# Altium PCB main_pcb.PcbDoc
Units mm, origin at the board's own origin, x right, y up, seen from the top; angles counter-clockwise.
Board outline 20 x 50 mm, 2 copper layers (Top Layer, Bottom Layer); 27 components, 16 nets, 108 pads, 18 vias.
Unrouted connection lines stored in the file: 1.
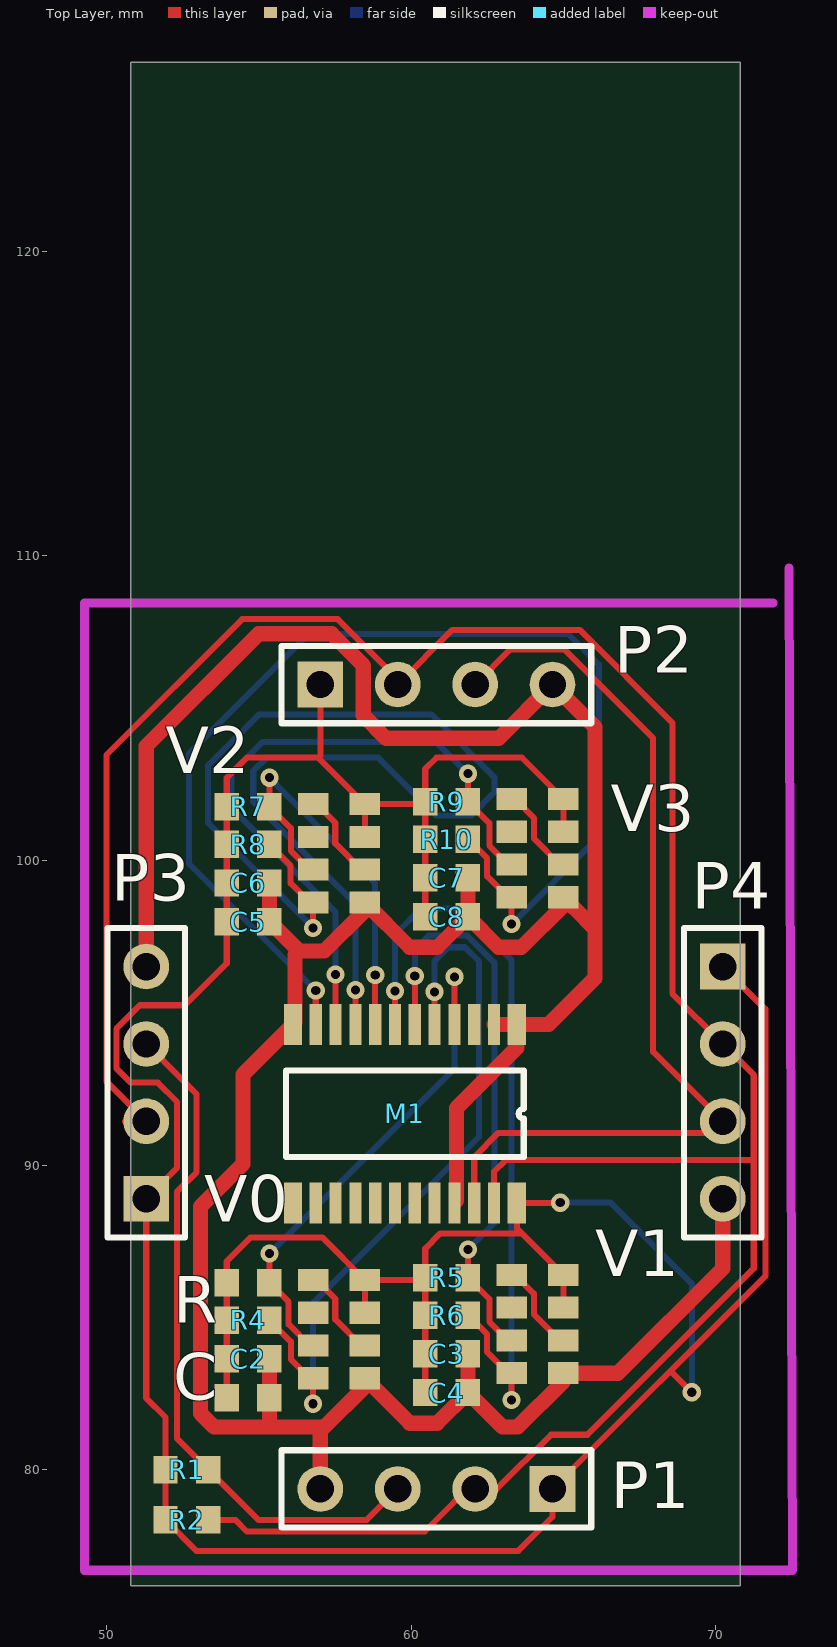
[diagram p0: Top Layer view]
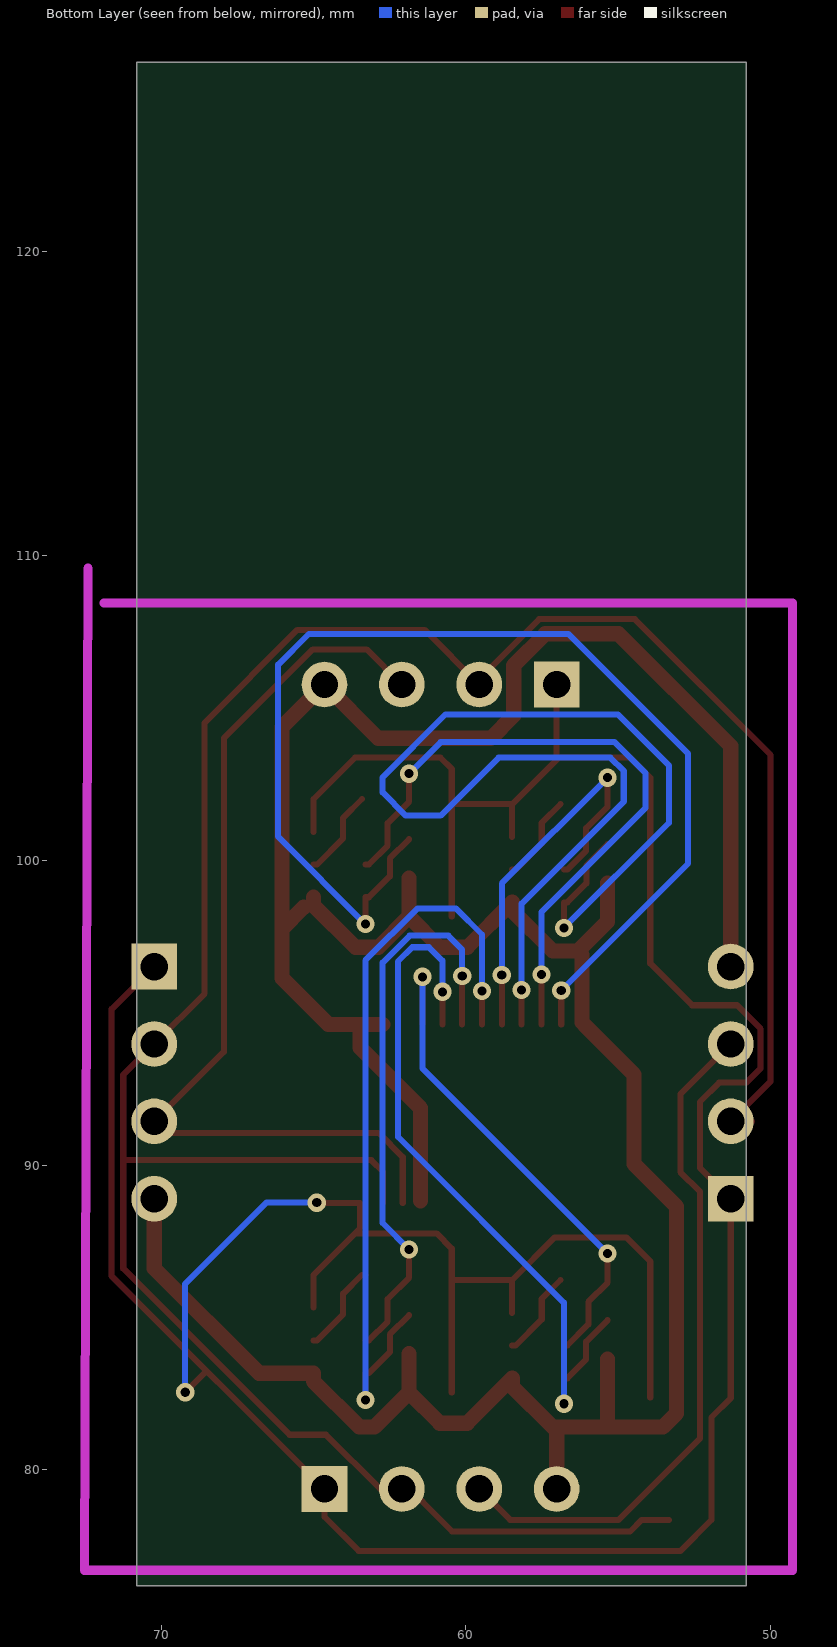
[diagram p1: Bottom Layer view, seen from below]

## Layer stack, top to bottom
Top Solder: solder mask 0.0102, Solder Resist, Dk 3.5
Top Layer: signal copper 0.0356
Dielectric 1: dielectric 0.32, FR-4, Dk 4.8
Bottom Layer: signal copper 0.0356
Bottom Solder: solder mask 0.0102, Solder Resist, Dk 3.5

## Board outline
50.8,76.2 70.8,76.2 70.8,126.2 50.8,126.2

## Design rules (kind name [scope] priority, off if disabled: settings)
Clearance [All] p1: gap=0.13
FabricationTestPointUsage TestPointUsage [All] p1: valid=0 allowmultiple=FALSE
FabricationTestpoint Testpoint [All] p1: side=3 testpointundercomponent=TRUE minsize=1.016 maxsize=2.54 preferedsize=1.524 minholesize=0 maxholesize=1.016 preferedholesize=0.813 testpointgrid=0.025 allowsidetop=TRUE allowsidebottom=TRUE usegrid=TRUE gridtolerance=0
HoleSize [All] p1: absolutevalues=TRUE maxlimit=3.9 minlimit=0.2 maxpercent=80.000 minpercent=20.000
HoleToHoleClearance [All] p1: gap=0.3 allowstackedmicrovias=TRUE
MinimumSolderMaskSliver [All] p1: minsoldermaskwidth=0.1
PlaneConnect [All] p1: planeconnectstyle=Relief reliefexpansion=0.5 reliefentries=4 reliefconductorwidth=0.4 reliefairgap=0.4
PolygonConnect [All] p1: connectstyle=Relief reliefconductorwidth=0.4 reliefentries=4 polygonreliefangle="90 Angle" airgapwidth=0.4
RoutingVias [All] p1: holewidth=0.3 width=0.6 viastyle="Through Hole" minholewidth=0.3 minwidth=0.6 maxholewidth=0.3 maxwidth=0.6
SilkToBoardRegionClearance UnpouredPolygon [All] p2:
SilkToSilkClearance [All] p1: silktosilkclearance=0
SilkToSolderMaskClearance SilkscreenOverComponentPads [IsPad] p1: minsilkscreentomaskgap=0 clearancetoexposedcopper=TRUE
SolderMaskExpansion [All] p1: expansion=-0.01
Width Power_Width [(InNet('5V') OR InNet('3V3') OR InNet('VCC') OR InNet('GND'))] p1: maxlimit=1 minlimit=0.4 preferedwidth=0.5 minimp=50.000000 maximp=50.000000 favimp=50.000000
Width [All] p2: maxlimit=0.2 minlimit=0.2 preferedwidth=0.2 minimp=50.000000 maximp=50.000000 favimp=50.000000
21 further rules are at their usual default settings.

## Components (designator, comment, footprint, x,y, rotation, side; value= is the part's Value field where it differs from the comment)
C "Cap" 1608[0603] 54.65,82.373 r180 top (schematic designator C1)
C2 "Cap" 1608[0603] 54.65,83.643 r180 top
C3 "Cap" 1608[0603] 61.166,83.81 r180 top
C4 "Cap" 1608[0603] 61.166,82.54 r180 top
C5 "Cap" 1608[0603] 54.65,97.994 r180 top
C6 "Cap" 1608[0603] 54.65,99.264 r180 top
C7 "Cap" 1608[0603] 61.166,99.431 r180 top
C8 "Cap" 1608[0603] 61.166,98.161 r180 top
M1 "PCA9547" TSSOP24 63.373,94.615 r270 top
P1 "Header 4" HDR1X4 64.643,79.375 r180 top
P2 "Header 4" HDR1X4 57.023,105.778 r0 top
P3 "Header 4" HDR1X4 51.308,88.9 r90 top
P4 "Header 4" HDR1X4 70.231,96.52 r270 top
R "Res1" 1608[0603] 54.65,86.146 r180 top (schematic designator R3)
R1 "Res1" 1608[0603] 52.64,80.01 r180 top
R2 "Res1" 1608[0603] 52.64,78.359 r180 top
R4 "Res1" 1608[0603] 54.65,84.913 r180 top
R5 "Res1" 1608[0603] 61.166,86.312 r180 top
R6 "Res1" 1608[0603] 61.166,85.08 r180 top
R7 "Res1" 1608[0603] 54.65,101.767 r180 top
R8 "Res1" 1608[0603] 54.65,100.534 r180 top
R9 "Res1" 1608[0603] 61.166,101.933 r180 top
R10 "Res1" 1608[0603] 61.166,100.701 r180 top
V0 "VCNL4040" SOP8 58.333,83.008 r180 top
V1 "VCNL4040" SOP8 64.849,83.175 r180 top
V2 "VCNL4040" SOP8 58.333,98.629 r180 top
V3 "VCNL4040" SOP8 64.849,98.796 r180 top

## Footprints (in the part's own frame and the unit in brackets; to place one, negate y for a bottom-side part, rotate by r counter-clockwise, add the part's x,y. Pads: shape width x height; smd on the part's side, far side on the other; paste and mask are expansions set on the pad)
1608[0603] [mm] "Chip Capacitor, Body 1.6x0.8mm, IPC High Density"
  rect 0.8x0.9 smd: 1(-0.7,0) 2(0.7,0)
  body extent -0.87,-0.48 0.87,0.48, height 1.3
HDR1X4 [mm] "Connector; Header; 4 Position"
  rect 1.5x1.5 hole 0.9: 1(0,0)
  round 1.5 hole 0.9: 2(2.54,0) 3(5.08,0) 4(7.62,0)
  silkscreen extent -1.27,-1.27 8.89,1.27
SOP8 [mm]
  rect 1x0.725 smd: 1(-0.15,0) 2(-0.15,-1.075) 3(-0.15,-2.15) 4(-0.15,-3.225) 5(1.55,-3.225) 6(1.55,-2.15) 7(1.55,-1.075) 8(1.55,0)
TSSOP24 [mm]
  rect 1.35x0.6 smd: 1(0,0.1) 12(0,-7.25) 13(5.85,-7.25) 24(5.85,0.1)
  rect 1.35x0.4 smd: 2(0,-0.65) 3(0,-1.3) 4(0,-1.95) 5(0,-2.6) 6(0,-3.25) 7(0,-3.9) 8(0,-4.55) 9(0,-5.2) 10(0,-5.85) 11(0,-6.5) 14(5.85,-6.5) 15(5.85,-5.85) 16(5.85,-5.2) 17(5.85,-4.55) 18(5.85,-3.9) 19(5.85,-3.25) 20(5.85,-2.6) 21(5.85,-1.95) 22(5.85,-1.3) 23(5.85,-0.65)
  silkscreen extent 1.51,-7.48 4.34,0.33

## Part data
C C2 C3 C4 C5 C6 C7 C8: "Capacitor"
P1 P2 P3 P4: "Header, 4-Pin"
R R1 R2 R4 R5 R6 R7 R8 R9 R10: "Resistor"
V0 V1 V2 V3: library part Component_1

## Via types
v1: diameter 0.6, hole 0.3, Top Layer to Bottom Layer, 18 vias

## Nets (pads, with @x,y where several pads share a name; then routed paths per layer and width w, separated by ;. In a path a pad name is that pad's centre, name@x,y a point inside that pad or via, vN(x,y) a via of type N, cw(c..) or ccw(c..) an arc to the next point about the centre after c; other vN are vias at no path point)
GND: C2.1 C3.1 C4.1 C5.1 C6.1 C7.1 C8.1 C.1 M1.1 M1.2 M1.12 M1.21 P1.4 P2.4 P3.4 P4.4 V0.1 V1.1 V2.1 V3.1 | length 108.5
  Top Layer w0.5: P3.4 51.308,103.759 54.991,107.442 57.396,107.442 58.433,106.405 58.433,104.762 59.182,104.013 62.878,104.013 P2.4 66.04,104.381 66.04,97.755 ; 55.35,81.418 C.1 C2.1 ; C6.1 C5.1 56.316,97.028 ; M1.12 54.483,92.975 54.483,90.043 53.086,88.646 53.086,81.85 53.529,81.407 57.15,81.407 58.483,82.74 V0.1 59.957,81.534 60.861,81.534 C4.1 ; M1.12@56.193,94.685 56.193,96.905 56.316,97.028 ; P1.4@57.023,79.629 57.023,81.28 ; M1.21@61.493,88.835 61.493,91.879 63.473,93.859 M1.1 ; C3.1 C4.1 ; C7.1 C8.1 ; M1.2 M1.1 ; V3.1 64.999,98.527 63.627,97.155 62.872,97.155 C8.1 ; V3.1@65.324,98.471 66.04,97.755 ; P4.4 70.231,86.614 66.792,83.175 V1.1 64.999,82.906 63.5,81.407 62.999,81.407 C4.1 ; 56.316,97.028 57.15,97.028 58.483,98.361 V2.1 59.957,97.155 60.861,97.155 C8.1 ; M1.1 64.516,94.615 66.04,96.139 66.04,97.755
NetC1_2: C2.2 C3.2 C4.2 C5.2 C6.2 C7.2 C8.2 C.2 M1.24 P1.1 P2.1 P3.1 P4.1 R1.2 R2.2 R4.2 R5.2 R6.2 R7.2 R8.2 R9.2 R10.2 R.2 V0.3 V0.4 V1.3 V1.4 V2.3 V2.4 V3.3 V3.4 | length 122.2
  Top Layer w0.2: C.2 C2.2 R4.2 R.2 53.95,86.843 54.737,87.63 57.086,87.63 V0.4 ; 57.023,103.442 P2.1 ; V0.3 V0.4 ; V2.3 V2.4 ; R5.2@60.387,86.233 V0.4 ; R9.2@60.387,101.854 V2.4 ; C4.2 C3.2 R6.2 R5.2 60.466,87.263 60.965,87.762 63.637,87.762 ; C8.2 C7.2 R10.2 R9.2 60.466,103.011 60.838,103.383 63.637,103.383 V3.4 V3.3 ; v1@64.889,88.765 M1.24 63.473,87.926 63.637,87.762 ; V1.3 V1.4 63.637,87.762 ; 68.58,83.185 v1(69.215,82.55) ; P4.1 71.628,95.123 71.628,86.36 P1.1 64.643,78.461 63.525,77.343 52.956,77.343 R2.2 R1.2 51.94,81.726 51.308,82.358 P3.1 52.324,89.916 52.324,92.075 51.689,92.71 50.8,92.71 50.328,93.182 50.328,94.477 51.101,95.25 52.578,95.25 53.95,96.622 C5.2 C6.2 R8.2 R7.2 53.95,102.718 54.61,103.378 56.959,103.378 V2.4
  Bottom Layer w0.2: v1(64.897,88.773) 66.548,88.773 69.215,86.106 v1(69.215,82.55)
NetM1_4: M1.4 R.1 V0.7 | length 16.8
  Top Layer w0.2: v1(55.35,87.1) R.1 55.98,85.515 55.98,84.773 56.67,84.083 V0.7 ; M1.4 v1(61.423,96.184)
  Bottom Layer w0.2: v1(55.35,87.1) 61.423,93.173 v1(61.423,96.184)
NetM1_5: M1.5 R4.1 V0.8 | length 24.1
  Top Layer w0.2: R4.1 56.053,84.21 56.053,83.625 56.67,83.008 V0.8 v1(56.783,82.169) ; M1.5 v1(60.773,95.691)
  Bottom Layer w0.2: v1(56.783,82.169) 56.783,85.485 62.23,90.932 62.23,96.688 61.763,97.155 61.214,97.155 60.773,96.714 v1(60.773,95.691)
NetM1_6: M1.6 R5.1 V1.7 | length 19.1
  Top Layer w0.2: M1.6 v1(60.123,96.214) ; v1(61.866,87.232) R5.1 62.569,85.609 62.569,84.867 63.186,84.25 V1.7
  Bottom Layer w0.2: v1(60.123,96.214) 60.123,97.08 60.579,97.536 61.849,97.536 62.738,96.647 62.738,88.104 v1(61.866,87.232)
NetM1_7: M1.7 R6.1 V1.8 | length 25.9
  Top Layer w0.2: M1.7 v1(59.473,95.721) ; R6.1@61.866,85.077 62.496,84.447 62.496,83.865 63.186,83.175 V1.8 v1(63.299,82.296)
  Bottom Layer w0.2: v1@59.593,95.841 v1(59.473,95.721) 59.473,97.573 60.325,98.425 61.595,98.425 63.299,96.721 v1(63.299,82.296)
NetM1_8: M1.8 R7.1 V2.7 | length 13.2
  Top Layer w0.2: v1(55.35,102.721) R7.1 56.053,101.064 56.053,100.321 56.67,99.704 V2.7 ; M1.8 v1(58.823,96.244)
  Bottom Layer w0.2: v1(55.35,102.721) 58.823,99.248 v1(58.823,96.244)
NetM1_9: M1.9 R8.1 V2.8 | length 40.5
  Top Layer w0.2: R8.1 56.047,99.837 56.047,99.252 56.67,98.629 V2.8 v1(56.783,97.79) ; M1.9 v1(58.173,95.751)
  Bottom Layer w0.2: v1(56.783,97.79) 53.34,101.233 53.34,103.124 55.014,104.798 60.671,104.798 62.738,102.731 62.738,102.235 61.976,101.473 60.833,101.473 58.928,103.378 55.257,103.378 54.82,102.941 54.82,101.937 58.173,98.584 v1(58.173,95.751)
NetM1_10: M1.10 R9.1 V3.7 | length 21.9
  Top Layer w0.2: M1.10 v1(57.523,96.258) ; v1(61.866,102.853) R9.1 62.569,101.23 62.569,100.488 63.186,99.871 V3.7
  Bottom Layer w0.2: v1(57.523,96.258) 57.523,98.306 54.102,101.727 54.102,102.87 55.118,103.886 60.833,103.886 v1(61.866,102.853)
NetM1_11: M1.11 R10.1 V3.8 | length 39.3
  Top Layer w0.2: M1.11 v1(56.873,95.735) ; R10.1 62.496,100.071 62.496,99.486 63.186,98.796 V3.8 v1(63.299,97.917)
  Bottom Layer w0.2: v1(56.873,95.735) 52.705,99.903 52.705,103.505 56.642,107.442 65.151,107.442 66.167,106.426 66.167,100.785 v1(63.299,97.917)
NetM1_22: M1.22 P1.3 P2.3 P3.3 P4.3 R1.1 | length 53.9
  Top Layer w0.2: P3.3 52.959,92.329 52.959,89.773 52.324,89.138 52.324,81.026 R1.1 54.991,78.359 58.547,78.359 P1.3 ; M1.22 62.073,90.267 62.865,91.059 69.85,91.059 P4.3 67.945,93.726 67.945,104.013 65.024,106.934 63.259,106.934 P2.3
NetM1_23: M1.23 P1.2 P2.2 P3.2 P4.2 R2.1 | length 87.5
  Top Layer w0.2: P3.2@50.618,91.44 P3.2 49.998,92.75 49.998,103.465 54.455,107.922 57.595,107.922 59.563,105.954 P2.2 61.354,107.569 65.532,107.569 68.58,104.521 68.58,95.631 P4.2 71.247,92.964 71.247,86.614 65.786,81.153 64.596,81.153 62.818,79.375 P1.2 ; R2.1 54.229,78.359 54.61,77.978 60.452,77.978 P1.2@62.342,79.868 ; M1.23 62.723,89.789 63.104,90.17 71.247,90.17
NetV0_2: V0.2 V0.5 | length 2.9
  Top Layer w0.2: V0.5@56.896,86.233 57.513,85.616 57.513,84.94 58.37,84.083 V0.2
NetV1_2: V1.2 V1.5 | length 3
  Top Layer w0.2: V1.5 63.412,86.4 64.029,85.782 64.029,85.107 64.886,84.25 V1.2
NetV2_2: V2.2 V2.5 | length 2.9
  Top Layer w0.2: V2.5@56.896,101.854 57.513,101.237 57.513,100.561 58.37,99.704 V2.2
NetV3_2: V3.2 V3.5 | length 2.9
  Top Layer w0.2: V3.5@63.412,102.021 64.029,101.403 64.029,100.728 64.886,99.871 V3.2
pads on no net: M1.3 M1.13 M1.14 M1.15 M1.16 M1.17 M1.18 M1.19 M1.20 V0.6 V1.6 V2.6 V3.6

## Keep-outs
Keep-Out Layer:
  lines w0.3: 71.882,108.458 49.276,108.458 49.276,76.708 72.526,76.708 72.402,109.595

## Silkscreen, mask and mechanical layers (free items; w line width, h text height)
Drill Drawing:
  text ".LEGEND" at 75.88,81.28 h1.52
  text "Drill Drawing." at 75.88,78.74 h1.52

## Dimensions
49.276,75.819 to 72.526,76.708 on Mechanical 1
49.276,76.708 to 49.276,108.458 on Mechanical 1